# EAGLE board Touch.Cat.0.6 (EAGLE 9.6.2)
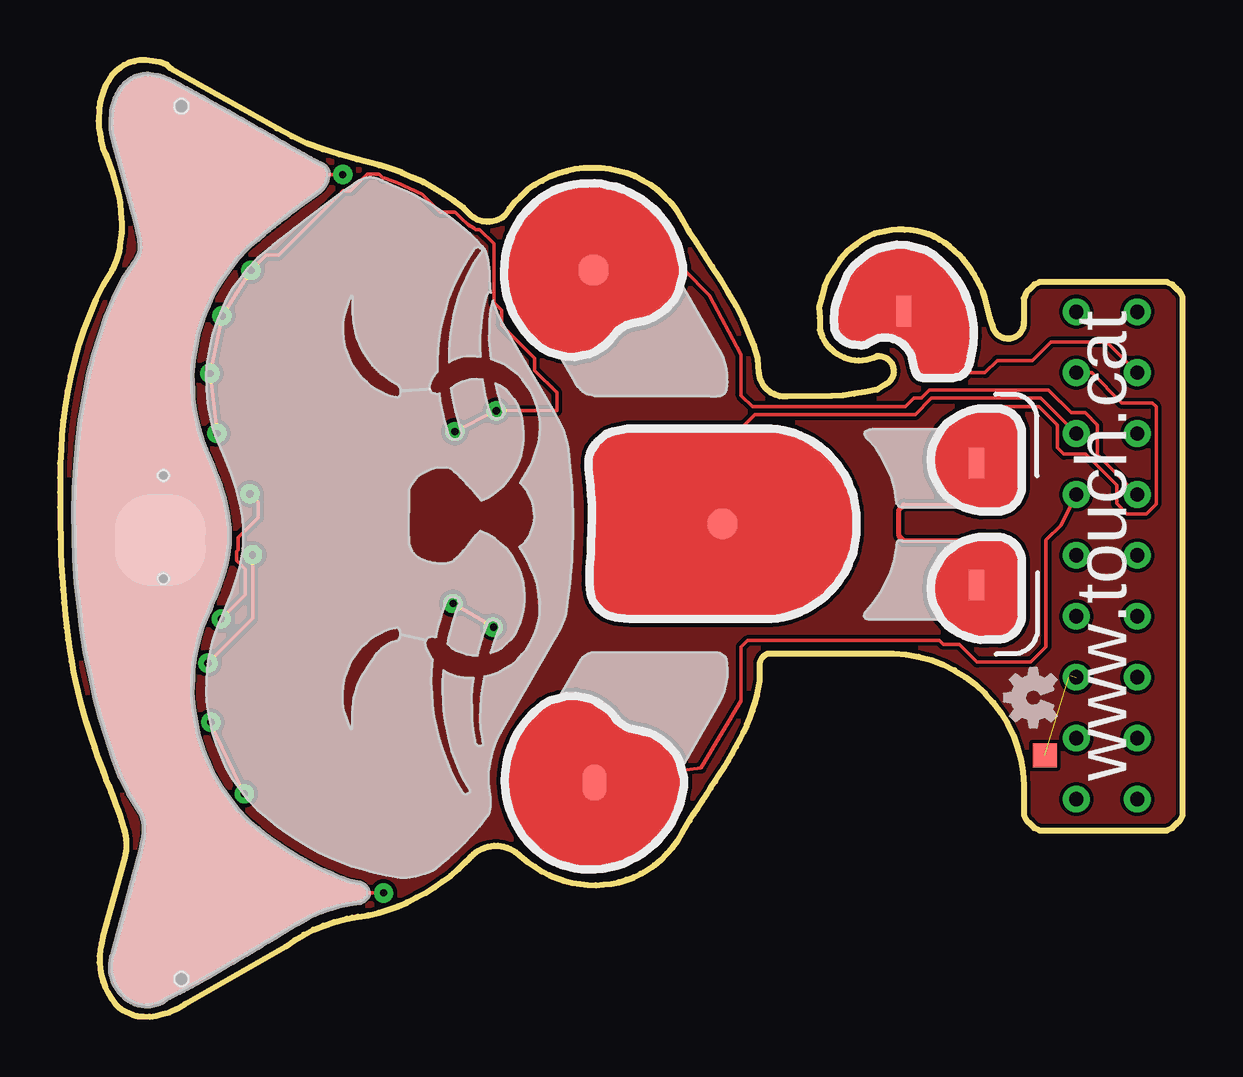
[diagram p0: board, top side]
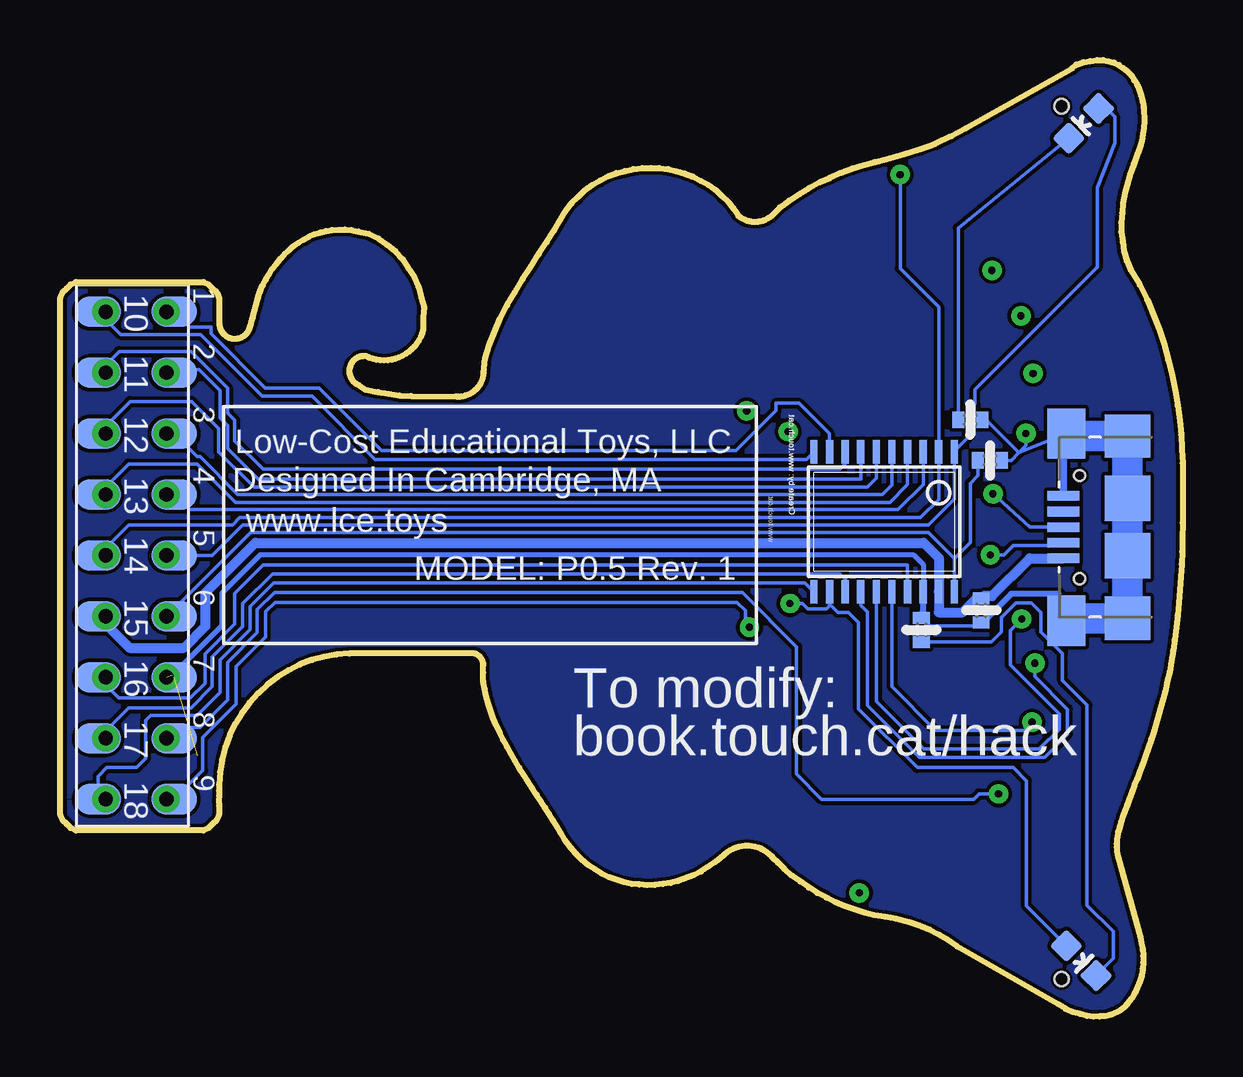
[diagram p1: board, bottom side, seen from below]

Size 46.8 x 39.88 mm. Coordinates in mm from the lower left corner, seen from the top.
Outline: 40.18,9.67 40.18,9.43 40.18,9.21 40.19,8.99 40.18,8.8 40.18,8.42 40.28,8.19 40.45,8.03 40.61,7.86 40.84,7.76 46.14,7.76 46.37,7.86 46.53,8.03 46.7,8.19 46.8,8.42 46.8,29.97 46.7,30.2 46.53,30.36 46.37,30.52 46.14,30.62 40.84,30.62 40.61,30.52 40.45,30.36 40.28,30.2 40.17,29.94 40.17,28.94 arc-176 38.87,28.84 38.77,29.14 38.55,29.99 38.46,30.24 38.35,30.49 38.23,30.72 38.1,30.95 37.96,31.17 37.8,31.38 37.64,31.58 37.46,31.78 37.27,31.94 37.08,32.11 36.88,32.26 36.66,32.39 36.44,32.51 36.21,32.61 35.96,32.69 35.72,32.76 35.47,32.8 35.2,32.81 34.94,32.81 34.66,32.79 34.38,32.73 33.94,32.63 33.54,32.44 33.18,32.18 32.83,31.92 32.53,31.59 32.29,31.21 32.05,30.84 31.87,30.43 31.75,30 31.64,29.57 31.67,29.14 31.67,28.64 arc102 34.07,27.54 arc-162 34.37,26.34 34.07,26.14 33.57,26.04 33.11,25.97 32.66,25.9 32.18,25.88 30.3,25.86 arc-92 29.14,26.84 29.09,27.44 28.93,27.98 28.7,28.54 28.47,29.1 28.17,29.65 27.85,30.2 27.53,30.74 27.18,31.27 26.85,31.78 26.52,32.28 26.21,32.77 25.95,33.22 25.73,33.59 25.48,33.91 25.2,34.18 24.92,34.45 24.62,34.68 24.29,34.85 23.96,35.03 23.62,35.16 23.26,35.25 22.91,35.34 22.55,35.38 22.19,35.38 21.82,35.38 21.46,35.33 21.11,35.24 20.77,35.15 20.42,35.02 20.1,34.85 19.79,34.68 19.49,34.47 19.22,34.21 18.95,33.96 18.73,33.69 18.53,33.39 arc-79 17.15,33.38 16.8,33.73 16.41,34.02 16,34.28 15.58,34.55 15.15,34.78 14.7,34.98 14.25,35.18 13.79,35.35 13.32,35.49 12.85,35.63 12.37,35.74 11.64,35.95 arc-15 9.05,37.03 4.62,39.53 4.45,39.69 4.15,39.79 3.87,39.84 3.59,39.88 3.33,39.87 3.1,39.82 2.88,39.77 2.67,39.67 2.49,39.54 2.31,39.4 2.16,39.24 2.04,39.04 1.91,38.84 1.81,38.62 1.74,38.38 1.67,38.13 1.63,37.87 1.61,37.33 1.62,37.06 1.67,36.78 1.71,36.5 1.79,36.22 1.9,35.95 2.06,35.55 2.2,35.14 2.42,34.33 2.5,33.92 2.54,33.52 2.58,33.11 2.57,32.7 2.52,32.31 2.46,31.9 2.35,31.51 2.17,31.12 1.8,30.51 1.5,29.89 0.98,28.64 0.78,28.01 0.61,27.38 0.44,26.71 0.31,26.08 0.22,25.47 0.13,24.85 0.08,24.26 0.04,23.66 0.01,23.07 0,22.47 0,21.85 0,21.23 0.02,20.59 0.03,19.91 0.04,19.39 0.06,18.86 0.09,18.32 0.12,17.79 0.17,17.25 0.22,16.74 0.28,16.22 0.34,15.72 0.41,15.26 0.48,14.8 0.56,14.37 0.64,14.01 0.74,13.55 0.85,13.12 1.08,12.31 1.2,11.92 1.32,11.56 1.44,11.2 1.56,10.86 1.68,10.54 1.8,10.22 1.91,9.92 2.02,9.63 2.13,9.35 2.23,9.09 2.33,8.84 2.42,8.59 2.5,8.36 2.57,8.14 2.64,7.92 2.7,7.72 2.73,7.52 arc-27 2.69,6.62 1.78,3.34 1.73,3.07 arc52 2.31,0.53 2.45,0.39 2.62,0.26 3.02,0.08 3.24,0.03 3.48,0.01 3.73,0 4,0.03 4.29,0.11 4.58,0.19 4.88,0.33 5.2,0.52 9.42,2.93 arc-21 11.41,3.94 11.96,4.08 12.18,4.12 12.43,4.16 12.86,4.23 13.28,4.34 14.1,4.61 14.49,4.77 14.86,4.97 15.24,5.16 15.6,5.39 15.95,5.63 16.29,5.88 16.62,6.15 16.89,6.43 17.05,6.58 arc-99 19.2,6.68 19.49,6.45 19.8,6.25 20.09,6.05 20.4,5.9 21.03,5.66 21.36,5.58 21.68,5.53 22.01,5.49 22.34,5.48 22.66,5.51 22.98,5.54 23.3,5.6 23.61,5.71 23.92,5.81 24.22,5.95 24.78,6.32 25.05,6.53 25.29,6.79 25.53,7.05 25.75,7.34 25.95,7.68 26.09,7.93 26.25,8.18 26.42,8.45 26.58,8.71 26.76,8.98 26.94,9.25 27.12,9.53 27.31,9.81 27.49,10.09 27.67,10.38 27.85,10.67 28.01,10.96 28.18,11.26 28.34,11.56 28.49,11.86 28.63,12.16 28.76,12.46 28.87,12.77 28.97,13.07 29.05,13.38 29.11,13.68 29.17,13.99 29.17,14.34 29.17,14.64 arc-76 29.52,15.14 34.75,15.14 arc-87 40.18,9.67
Copper layers (1*16): Top 0.035mm / dielectric 1.5mm / Bottom 0.035mm
Design rules "default *": minimum track width 6mil, minimum drill 0.35mm, track to track 6mil, track to pad 6mil, pad to pad 6mil, via to via 6mil, smd to smd 6mil, copper to edge 6mil, drill to drill 6mil, minimum pad ring 10mil, minimum via ring 8mil, stop-mask expansion 4mil, vias tented up to drill 0mil, thermal gap 10mil
Holes 0.6 mm at 5.06,1.57 5.06,37.95

## Footprints (pad centres in the part's own frame; a part is rotated, then mirrored left to right if it is on the bottom)
C0402 = smd 0.5 x 0.7: 1 -0.5,0; 2 0.5,0
TSSOP20 = smd 0.305 x 0.991: 1 -2.925,-2.918; 2 -2.275,-2.918; 3 -1.625,-2.918; 4 -0.975,-2.918; 5 -0.325,-2.918; 6 0.325,-2.918; 7 0.975,-2.918; 8 1.625,-2.918; 9 2.275,-2.918; 10 2.925,-2.918; 11 2.925,2.918; 12 2.275,2.918; 13 1.625,2.918; 14 0.975,2.918; 15 0.325,2.918; 16 -0.325,2.918; 17 -0.975,2.918; 18 -1.625,2.918; 19 -2.275,2.918; 20 -2.925,2.918
GHI-CONNECTORS_10118192-0001LF(MICRO-USB-B-AMPHENOL-FCI) = smd 1.8 x 1.9: CGND1 -3.8,0; CGND4 3.8,0 | smd 1.9 x 1.9: CGND2 -1.2,0; CGND3 1.2,0 | smd 2.1 x 1.6: CGND5 3.9,2.55; CGND6 -3.9,2.55 | smd 0.4 x 1.35: D+ 0,2.675; D- -0.65,2.675; GND 1.3,2.675; ID 0.65,2.675; VCC -1.3,2.675 | hole 0.45: -2.15,2; 2.15,2
PADVIA = drill 0.3: P$1 0,0
COM = drill 0.6: 1 8.89,1.27; 2 6.35,1.27; 3 3.81,1.27; 4 1.27,1.27; 5 -1.27,1.27; 6 -3.81,1.27; 7 -6.35,1.27; 8 -8.89,1.27; 9 -11.43,1.27; 10 8.89,-1.27; 11 6.35,-1.27; 12 3.81,-1.27; 13 1.27,-1.27; 14 -1.27,-1.27; 15 -3.81,-1.27; 16 -6.35,-1.27; 17 -8.89,-1.27; 18 -11.43,-1.27 | smd 1.27 x 1.905 bottom: 1.1 8.89,1.587; 2.1 6.35,1.587; 3.1 3.81,1.587; 4.1 1.27,1.587; 5.1 -1.27,1.587; 6.1 -3.81,1.587; 7.1 -6.35,1.587; 8.1 -8.89,1.587; 9.1 -11.43,1.587; 10.1 8.89,-1.587; 11.1 6.35,-1.587; 12.1 3.81,-1.587; 13.1 1.27,-1.587; 14.1 -1.27,-1.587; 15.1 -3.81,-1.587; 16.1 -6.35,-1.587; 17.1 -8.89,-1.587; 18.1 -11.43,-1.587
HEAD-TOUCH-CAT = smd 3.81 x 3.81: P$1 0,0
BELLY-TOUCH-CAT = smd 1.27 x 1.27: P$1 0,0
RIGHT_HAND-TOUCH-CAT = smd 1.5 x 1: P$1 0,0
LEFT_HAND-TOUCH-CAT = smd 1.27 x 1.27: P$1 0,0
FEET-TOUCH-CAT = smd 1.27 x 0.635: P$1 -2.54,0; P$2 2.54,0
TAIL-TOUCH-CAT = smd 1.27 x 0.635: P$1 0,0
0603-ORANGE = smd 1 x 1: A 0,-0.877; C 0,0.877
R0402 = smd 0.5 x 0.7: 1 -0.5,0; 2 0.5,0
OSHW-LOGO-MINI = smd 1 x 1: P$1 -2.4,-0.5

## Placement (x,y rotation side)
C1  [C0402]  8.04,23.19 180 bottom
C2  [C0402]  8.41,16.94 90 bottom
U$1  CHIP-TOUCH-CAT  [TSSOP20]  12.45,20.63 180 bottom
U$2  USB  [GHI-CONNECTORS_10118192-0001LF(MICRO-USB-B-AMPHENOL-FCI)]  2.31,20.41 90 bottom
U$3  PADVIA  [PADVIA]  18.07,16.24 90 top
U$4  COM-TOUCH-CAT  [COM]  43.64,20.5 90 top
U$5  PADVIA  [PADVIA]  16.38,17.22 90 top
U$6  PADVIA  [PADVIA]  18.19,25.26 90 top
U$7  PADVIA  [PADVIA]  16.45,24.39 90 top
U$8  PADVIA  [PADVIA]  13.49,5.16 90 top
U$9  PADVIA  [PADVIA]  11.78,35.1 90 top
U$11  PADVIA  [PADVIA]  7.69,9.29 90 top
U$12  PADVIA  [PADVIA]  6.29,12.27 90 top
U$13  PADVIA  [PADVIA]  7.92,21.8 90 top
U$14  PADVIA  [PADVIA]  6.72,16.58 90 top
U$15  PADVIA  [PADVIA]  6.17,14.74 90 top
U$16  PADVIA  [PADVIA]  8.03,19.25 90 top
U$17  HEAD-TOUCH-CAT  [HEAD-TOUCH-CAT]  4.17,19.87 90 top
U$18  BELLY-TOUCH-CAT  [BELLY-TOUCH-CAT]  27.61,20.55 90 top
U$19  RIGHT_HAND-TOUCH-CAT  [RIGHT_HAND-TOUCH-CAT]  22.28,9.76 90 top
U$20  LEFT_HAND-TOUCH-CAT  [LEFT_HAND-TOUCH-CAT]  22.24,31.12 90 top
U$21  FEET-TOUCH-CAT  [FEET-TOUCH-CAT]  38.2,20.53 90 top
U$22  TAIL-TOUCH-CAT  [TAIL-TOUCH-CAT]  35.18,29.4 90 top
U$23  PADVIA  [PADVIA]  6.55,24.31 90 top
U$24  PADVIA  [PADVIA]  6.25,26.81 90 top
U$25  PADVIA  [PADVIA]  6.75,29.21 90 top
U$26  PADVIA  [PADVIA]  7.96,31.11 90 top
U$27  [0603-ORANGE]  4.24,2.33 225 bottom
U$28  [R0402]  8.87,24.88 180 bottom
U$29  [0603-ORANGE]  4.14,37.24 135 bottom
U$30  [R0402]  10.9,16.13 270 bottom
U$31  OSHW-LOGO  [OSHW-LOGO-MINI]  40.56,13.3 90 top
U$33  ABOUT-TOUCH-CAT  [ABOUT-TOUCH-CAT]  44.57,19.74 90 top

## Library data of the parts
C1 C2 = Touch
U$1 U$3-U$9 U$11-U$30 U$33 = Touch-cat
U$2 U$31 = chip-brain

## Nets
1: U$1.9 U$4.1 U$4.1.1
BELLY: U$1.5 U$4.3 U$4.3.1 U$18.P$1
FEET: U$1.7 U$4.2 U$4.2.1 U$21.P$1 U$21.P$2
GND: C1.1 C2.1 U$1.18 U$2.CGND1 U$2.CGND2 U$2.CGND3 U$2.CGND4 U$2.CGND5 U$2.CGND6 U$2.GND U$4.7 U$4.7.1 U$6.P$1 U$7.P$1 U$23.P$1 U$24.P$1 U$25.P$1 U$26.P$1 U$28.1 U$30.1 U$31.P$1
HEAD: U$1.2 U$4.14 U$4.14.1 U$8.P$1 U$9.P$1 U$17.P$1
ID: U$2.ID
LEFT_HAND: U$1.4 U$4.13 U$4.13.1 U$20.P$1
N$2: U$27.C U$30.2
N$19: U$28.2 U$29.C
PIN1: U$1.1 U$4.5 U$4.5.1 U$29.A
PIN6: U$1.6 U$4.12 U$4.12.1
PIN10: U$1.10 U$4.10 U$4.10.1
PIN11: U$1.11 U$4.18 U$4.18.1
PIN12: U$1.12 U$3.P$1 U$4.9 U$4.9.1 U$5.P$1 U$27.A
PIN13: U$1.13 U$4.17 U$4.17.1
PIN16: U$1.16 U$4.8 U$4.8.1 U$11.P$1 U$12.P$1
PIN17: U$1.17 U$4.16 U$4.16.1
PIN20: C1.2 U$1.20 U$4.6 U$4.6.1
RIGHT_HAND: U$1.3 U$4.4 U$4.4.1 U$19.P$1
TAIL: U$1.8 U$4.11 U$4.11.1 U$22.P$1
UDM: U$1.15 U$2.D+ U$13.P$1 U$14.P$1
UDP: U$1.14 U$2.D- U$15.P$1 U$16.P$1
VCC: C2.2 U$1.19 U$2.VCC U$4.15 U$4.15.1

## Tracks (layer width: path | path; a pad name or v marks a point on that pad's centre or on a via)
1
  Bottom 0.152: U$1.9 14.74,23.56 14.74,24.31 16.01,25.58 16.96,25.58 16.96,25.26 18.62,23.6 33.4,23.6 36.02,26.21 38.25,26.21 40.51,28.48 40.51,28.75 40.52,28.75 41.41,28.75 U$4.1.1 U$4.1
BELLY
  Top 0.152: U$18.P$1 27.64,20.58 27.64,23.77 28.97,25.09 35.65,25.09 36.33,25.78 40.89,25.78 U$4.3
  Bottom 0.152: U$1.5 12.13,22.16 12.52,21.77 39.39,21.77 40.97,23.34 41.08,23.34 U$4.3.1 U$4.3
FEET
  Top 0.152: U$4.2 43,26.85 44.27,25.58 45.54,25.58 45.69,25.43 45.69,21.37 45.28,20.96 44.47,20.96 44.05,21.38 44.05,22.15 42.75,23.45 41.85,23.45 41.58,23.72 41.58,24.66 40.81,25.44 39.21,25.44 38.21,24.44 U$21.P$2 | 38.54,23.41 U$21.P$2 | U$21.P$2
  Top 0.203: U$21.P$1 38.2,19.11 37.47,19.84 35.17,19.84 34.97,20.04 34.97,21.14 35.17,21.34 38.27,21.34 38.37,21.44 38.37,22.9 U$21.P$2
  Bottom 0.152: U$1.7 13.43,22.4 38.55,22.4 39.83,23.67 39.83,24.64 40.14,24.95 40.14,26.1 41.02,26.97 42.24,26.97 U$4.2 U$4.2.1
GND  (2 unrouted)
  Top 0.152: U$23.P$1 U$24.P$1 U$25.P$1 U$26.P$1 8.59,31.75 9.11,31.75 11.8,34.44 12.11,34.44 12.8,35.13 13.3,35.13 13.47,34.95 13.53,34.95 14.06,34.76 15.1,34.29 15.85,33.54 16.46,33.54 16.5,33.51 16.81,33.19 16.91,33.11 17,33.02 17.27,32.87 17.32,32.82 17.49,32.82 18.09,32.22 18.09,29.77 18.41,29.45 18.41,28.82 19.78,27.45 19.78,26.94 20.71,26.01 20.71,25.26 U$6.P$1 U$7.P$1
  Bottom 0.152: 8.41,16.45 C2.1 8.55,16.3 10.57,16.3 U$30.1 10.9,16.92 10.83,16.99 | 5.18,17.63 U$2.CGND6 | U$2.CGND5 6.84,23.51 | U$28.1 8.21,24.88 6.84,23.51 | C1.1 7.16,23.19 6.84,23.51 | 6.84,23.51 6.55,23.8 U$23.P$1 | 3.82,16.27 4.16,16.61
  Bottom 0.203: U$1.18 10.83,18.84 11.24,19.26 38.45,19.26 40.05,17.66 40.05,16.3 42.13,14.23
  Bottom 0.254: U$4.7.1 42.13,14.23 | 5.18,17.63 7.16,17.63 8.35,16.44 C2.1 | 10.83,16.74 10.83,16.99 U$1.18
  Bottom 0.305: U$2.GND 4.98,23.38 U$2.CGND5
  Bottom 1.27: U$2.CGND6 4.16,16.61 U$2.CGND1 U$2.CGND2 U$2.CGND3 U$2.CGND4 4.16,24.21 U$2.CGND5
HEAD
  Top 0.152: U$9.P$1 5.53,35.1 4.17,33.74 U$17.P$1 4.17,8.53 7.54,5.16 U$8.P$1
  Bottom 0.152: U$9.P$1 11.78,31.19 10.18,29.59 U$1.2 10.18,21.57 10.95,20.8 39.32,20.8 39.62,20.5 43.95,20.5 U$4.14.1 U$4.14
LEFT_HAND
  Top 0.152: U$4.13 43.24,23.43 43.24,24.67 42.73,25.18 42.15,25.18 41.21,26.12 36.24,26.12 35.91,25.79 35.59,25.79 35.23,25.43 28.86,25.43 28.39,25.9 28.39,27.61 27.08,30.07 26.03,31.12 U$20.P$1
  Bottom 0.152: U$1.4 11.48,22.17 12.21,21.44 39.5,21.44 41.09,23.04 43.95,23.04 U$4.13.1 U$4.13
N$1
  pour Top: 3.48,0.01 3.73,0 4,0.03 4.29,0.11 4.58,0.19 4.88,0.33 5.2,0.52 9.42,2.93 arc-21 11.41,3.94 11.96,4.08 12.18,4.12 12.43,4.16 12.86,4.23 13.28,4.34 14.1,4.61 14.49,4.77 14.86,4.97 15.24,5.16 15.6,5.39 15.95,5.63 16.29,5.88 16.62,6.15 16.89,6.43 17.05,6.58 arc-99 19.2,6.68 19.49,6.45 19.8,6.25 20.09,6.05 20.4,5.9 21.03,5.66 21.36,5.58 21.68,5.53 22.01,5.49 22.34,5.48 22.66,5.51 22.98,5.54 23.3,5.6 23.61,5.71 23.92,5.81 24.22,5.95 24.78,6.32 25.05,6.53 25.29,6.79 25.53,7.05 25.75,7.34 25.95,7.68 26.09,7.93 26.25,8.18 26.42,8.45 26.58,8.71 26.76,8.98 26.94,9.25 27.12,9.53 27.31,9.81 27.49,10.09 27.67,10.38 27.85,10.67 28.01,10.96 28.18,11.26 28.34,11.56 28.49,11.86 28.63,12.16 28.76,12.46 28.87,12.77 28.97,13.07 29.05,13.38 29.11,13.68 29.17,13.99 29.17,14.34 29.17,14.64 arc-76 29.52,15.14 34.75,15.14 arc-87 40.18,9.67 40.18,9.43 40.18,9.21 40.19,8.99 40.18,8.8 40.18,8.42 40.28,8.19 40.45,8.03 40.61,7.86 40.84,7.76 46.14,7.76 46.37,7.86 46.53,8.03 46.7,8.19 46.8,8.42 46.8,29.97 46.7,30.2 46.53,30.36 46.37,30.52 46.14,30.62 40.84,30.62 40.61,30.52 40.45,30.36 40.28,30.2 40.17,29.94 40.17,28.94 arc-176 38.87,28.84 38.77,29.14 38.55,29.99 38.46,30.24 38.35,30.49 38.23,30.72 38.1,30.95 37.96,31.17 37.8,31.38 37.64,31.58 37.46,31.78 37.27,31.94 37.08,32.11 36.88,32.26 36.66,32.39 36.44,32.51 36.21,32.61 35.96,32.69 35.72,32.76 35.47,32.8 35.2,32.81 34.94,32.81 34.66,32.79 34.38,32.73 33.94,32.63 33.54,32.44 33.18,32.18 32.83,31.92 32.53,31.59 32.29,31.21 32.05,30.84 31.87,30.43 31.75,30 31.64,29.57 31.67,29.14 31.67,28.64 arc102 34.07,27.54 arc-162 34.37,26.34 34.07,26.14 33.57,26.04 33.11,25.97 32.66,25.9 32.18,25.88 30.3,25.86 arc-92 29.14,26.84 29.09,27.44 28.93,27.98 28.7,28.54 28.47,29.1 28.17,29.65 27.85,30.2 27.53,30.74 27.18,31.27 26.85,31.78 26.52,32.28 26.21,32.77 25.95,33.22 25.73,33.59 25.48,33.91 25.2,34.18 24.92,34.45 24.62,34.68 24.29,34.85 23.96,35.03 23.62,35.16 23.26,35.25 22.91,35.34 22.55,35.38 22.19,35.38 21.82,35.38 21.46,35.33 21.11,35.24 20.77,35.15 20.42,35.02 20.1,34.85 19.79,34.68 19.49,34.47 19.22,34.21 18.95,33.96 18.73,33.69 18.53,33.39 arc-79 17.15,33.38 16.8,33.73 16.41,34.02 16,34.28 15.58,34.55 15.15,34.78 14.7,34.98 14.25,35.18 13.79,35.35 13.32,35.49 12.85,35.63 12.37,35.74 11.64,35.95 arc-15 9.05,37.03 4.62,39.53 4.45,39.69 4.15,39.79 3.87,39.84 3.59,39.88 3.33,39.87 3.1,39.82 2.88,39.77 2.67,39.67 2.49,39.54 2.31,39.4 2.16,39.24 2.04,39.04 1.91,38.84 1.81,38.62 1.74,38.38 1.67,38.13 1.63,37.87 1.61,37.33 1.62,37.06 1.67,36.78 1.71,36.5 1.79,36.22 1.9,35.95 2.06,35.55 2.2,35.14 2.42,34.33 2.5,33.92 2.54,33.52 2.58,33.11 2.57,32.7 2.52,32.31 2.46,31.9 2.35,31.51 2.17,31.12 1.8,30.51 1.5,29.89 0.98,28.64 0.78,28.01 0.61,27.38 0.44,26.71 0.31,26.08 0.22,25.47 0.13,24.85 0.08,24.26 0.04,23.66 0.01,23.07 0,22.47 0,21.85 0,21.23 0.02,20.59 0.03,19.91 0.04,19.39 0.06,18.86 0.09,18.32 0.12,17.79 0.17,17.25 0.22,16.74 0.28,16.22 0.34,15.72 0.41,15.26 0.48,14.8 0.56,14.37 0.64,14.01 0.74,13.55 0.85,13.12 1.08,12.31 1.2,11.92 1.32,11.56 1.44,11.2 1.56,10.86 1.68,10.54 1.8,10.22 1.91,9.92 2.02,9.63 2.13,9.35 2.23,9.09 2.33,8.84 2.42,8.59 2.5,8.36 2.57,8.14 2.64,7.92 2.7,7.72 2.73,7.52 arc-27 2.69,6.62 1.78,3.34 1.73,3.07 arc52 2.31,0.53 2.45,0.39 2.62,0.26 3.02,0.08 3.24,0.03
N$2
  Bottom 0.152: U$30.2 7.98,15.63 7.57,16.04 7.57,16.64 6.96,17.25 6.32,17.25 5.92,16.85 5.92,16.03 5.03,15.14 5.03,14.02 4,12.99 4,4.64 2.9,3.55 2.9,2.42 U$27.C
N$3
  pour Bottom: 3.48,0.01 3.73,0 4,0.03 4.29,0.11 4.58,0.19 4.88,0.33 5.2,0.52 9.42,2.93 arc-21 11.41,3.94 11.96,4.08 12.18,4.12 12.43,4.16 12.86,4.23 13.28,4.34 14.1,4.61 14.49,4.77 14.86,4.97 15.24,5.16 15.6,5.39 15.95,5.63 16.29,5.88 16.62,6.15 16.89,6.43 17.05,6.58 arc-99 19.2,6.68 19.49,6.45 19.8,6.25 20.09,6.05 20.4,5.9 21.03,5.66 21.36,5.58 21.68,5.53 22.01,5.49 22.34,5.48 22.66,5.51 22.98,5.54 23.3,5.6 23.61,5.71 23.92,5.81 24.22,5.95 24.78,6.32 25.05,6.53 25.29,6.79 25.53,7.05 25.75,7.34 25.95,7.68 26.09,7.93 26.25,8.18 26.42,8.45 26.58,8.71 26.76,8.98 26.94,9.25 27.12,9.53 27.31,9.81 27.49,10.09 27.67,10.38 27.85,10.67 28.01,10.96 28.18,11.26 28.34,11.56 28.49,11.86 28.63,12.16 28.76,12.46 28.87,12.77 28.97,13.07 29.05,13.38 29.11,13.68 29.17,13.99 29.17,14.34 29.17,14.64 arc-76 29.52,15.14 34.75,15.14 arc-87 40.18,9.67 40.18,9.43 40.18,9.21 40.19,8.99 40.18,8.8 40.18,8.42 40.28,8.19 40.45,8.03 40.61,7.86 40.84,7.76 46.14,7.76 46.37,7.86 46.53,8.03 46.7,8.19 46.8,8.42 46.8,29.97 46.7,30.2 46.53,30.36 46.37,30.52 46.14,30.62 40.84,30.62 40.61,30.52 40.45,30.36 40.28,30.2 40.17,29.94 40.17,28.94 arc-176 38.87,28.84 38.77,29.14 38.55,29.99 38.46,30.24 38.35,30.49 38.23,30.72 38.1,30.95 37.96,31.17 37.8,31.38 37.64,31.58 37.46,31.78 37.27,31.94 37.08,32.11 36.88,32.26 36.66,32.39 36.44,32.51 36.21,32.61 35.96,32.69 35.72,32.76 35.47,32.8 35.2,32.81 34.94,32.81 34.66,32.79 34.38,32.73 33.94,32.63 33.54,32.44 33.18,32.18 32.83,31.92 32.53,31.59 32.29,31.21 32.05,30.84 31.87,30.43 31.75,30 31.64,29.57 31.67,29.14 31.67,28.64 arc102 34.07,27.54 arc-162 34.37,26.34 34.07,26.14 33.57,26.04 33.11,25.97 32.66,25.9 32.18,25.88 30.3,25.86 arc-92 29.14,26.84 29.09,27.44 28.93,27.98 28.7,28.54 28.47,29.1 28.17,29.65 27.85,30.2 27.53,30.74 27.18,31.27 26.85,31.78 26.52,32.28 26.21,32.77 25.95,33.22 25.73,33.59 25.48,33.91 25.2,34.18 24.92,34.45 24.62,34.68 24.29,34.85 23.96,35.03 23.62,35.16 23.26,35.25 22.91,35.34 22.55,35.38 22.19,35.38 21.82,35.38 21.46,35.33 21.11,35.24 20.77,35.15 20.42,35.02 20.1,34.85 19.79,34.68 19.49,34.47 19.22,34.21 18.95,33.96 18.73,33.69 18.53,33.39 arc-79 17.15,33.38 16.8,33.73 16.41,34.02 16,34.28 15.58,34.55 15.15,34.78 14.7,34.98 14.25,35.18 13.79,35.35 13.32,35.49 12.85,35.63 12.37,35.74 11.64,35.95 arc-15 9.05,37.03 4.62,39.53 4.45,39.69 4.15,39.79 3.87,39.84 3.59,39.88 3.33,39.87 3.1,39.82 2.88,39.77 2.67,39.67 2.49,39.54 2.31,39.4 2.16,39.24 2.04,39.04 1.91,38.84 1.81,38.62 1.74,38.38 1.67,38.13 1.63,37.87 1.61,37.33 1.62,37.06 1.67,36.78 1.71,36.5 1.79,36.22 1.9,35.95 2.06,35.55 2.2,35.14 2.42,34.33 2.5,33.92 2.54,33.52 2.58,33.11 2.57,32.7 2.52,32.31 2.46,31.9 2.35,31.51 2.17,31.12 1.8,30.51 1.5,29.89 0.98,28.64 0.78,28.01 0.61,27.38 0.44,26.71 0.31,26.08 0.22,25.47 0.13,24.85 0.08,24.26 0.04,23.66 0.01,23.07 0,22.47 0,21.85 0,21.23 0.02,20.59 0.03,19.91 0.04,19.39 0.06,18.86 0.09,18.32 0.12,17.79 0.17,17.25 0.22,16.74 0.28,16.22 0.34,15.72 0.41,15.26 0.48,14.8 0.56,14.37 0.64,14.01 0.74,13.55 0.85,13.12 1.08,12.31 1.2,11.92 1.32,11.56 1.44,11.2 1.56,10.86 1.68,10.54 1.8,10.22 1.91,9.92 2.02,9.63 2.13,9.35 2.23,9.09 2.33,8.84 2.42,8.59 2.5,8.36 2.57,8.14 2.64,7.92 2.7,7.72 2.73,7.52 arc-27 2.69,6.62 1.78,3.34 1.73,3.07 arc52 2.31,0.53 2.45,0.39 2.62,0.26 3.02,0.08 3.24,0.03
N$19
  Bottom 0.152: U$29.C 9.37,32.88 U$28.2
PIN1
  Bottom 0.152: U$1.1 9.53,21.58 10.62,20.5 39.19,20.5 40.46,19.23 U$4.5.1 U$4.5 | 9.47,23.61 U$1.1 | U$1.1 9.53,23.58 8.87,24.24 8.87,25.34 8.67,25.54 8.67,26.14 3.56,31.25 3.56,34.55 2.85,36.42 2.85,37.52 3.19,37.86 U$29.A
PIN6
  Bottom 0.152: U$1.6 12.78,22.45 13.16,22.07 38.72,22.07 40.19,23.54 40.19,24.52 41.32,25.65 43.88,25.65 U$4.12.1 U$4.12
PIN10
  Bottom 0.152: U$1.10 15.7,23.23 33.66,23.23 36.3,25.87 38.38,25.87 40.95,28.44 44.28,28.44 U$4.10.1 U$4.10
PIN11
  Bottom 0.152: U$1.11 15.76,18.09 37.89,18.09 38.89,17.1 38.89,16.14 40.14,14.88 40.14,13.51 41.09,12.56 43.04,12.56 43.24,12.36 43.24,10.77 43.62,10.39 44.86,10.39 45.22,10.02 U$4.18.1 U$4.18
PIN12
  Top 0.152: U$3.P$1 U$5.P$1
  Bottom 0.152: U$5.P$1 15.86,17.22 15.63,16.99 14.86,16.99 14.74,17.11 14.74,17.2 | 14.74,17.2 U$1.12 | U$27.A 6.52,4.61 6.52,9.84 7.07,10.39 11.07,10.39 13.52,12.84 13.52,16.44 13.94,16.86 14.39,16.86 14.74,17.2 | U$3.P$1 18.2,16.37 18.23,16.37 18.23,16.92 18.59,17.28 37.84,17.28 38.24,16.88 38.24,15.82 39.47,14.59 39.47,13.04 40.86,11.65 40.86,10.26 U$4.9.1 U$4.9
PIN13
  Bottom 0.152: U$1.13 14.08,18.25 14.29,18.46 37.95,18.46 39.19,17.22 39.19,16.26 40.46,14.99 40.46,13.77 41.35,12.88 43.95,12.88 U$4.17.1 U$4.17
PIN16
  Top 0.152: U$11.P$1 6.29,12.21 U$12.P$1
  Bottom 0.152: U$11.P$1 8.49,9.29 8.71,9.07 15.06,9.07 16.11,10.11 16.11,15.42 18.37,17.68 37.87,17.68 38.58,16.97 38.58,16.01 39.83,14.76 39.83,13.2 40.97,12.06 41.6,12.06 U$4.8.1 U$4.8 | U$12.P$1 6.62,11.94 10.31,11.94 12.13,13.76 U$1.16
PIN17
  Bottom 0.152: U$1.17 11.48,18.82 11.48,18.83 38.33,18.83 39.52,17.64 39.52,16.36 40.77,15.12 40.77,13.89 41.37,13.28 44.36,13.28 U$4.16.1 U$4.16
PIN20
  Bottom 0.152: C1.2 8.54,22.56 8.87,22.23 8.87,19.76 9.53,19.1 U$1.20 9.53,19.11 10.62,20.19 38.86,20.19 42.05,17.01 U$4.6.1 U$4.6
RIGHT_HAND
  Top 0.152: U$4.4 41.73,20.5 41.09,19.86 41.09,15.42 40.46,14.78 38.22,14.78 37.48,15.52 36.81,15.52 36.65,15.68 28.66,15.68 28.39,15.42 28.39,13.16 26.72,10.37 U$19.P$1
  Bottom 0.152: U$1.3 10.83,22.19 11.88,21.13 41.41,21.13 U$4.4.1 U$4.4
TAIL
  Top 0.152: U$4.11 43.64,28.12 41.29,28.12 40.53,27.36 39.07,27.36 38.55,26.85 37.73,26.85 U$22.P$1
  Bottom 0.152: U$1.8 14.07,23.05 14.3,22.82 38.34,22.82 39.52,24 39.52,24.86 39.83,25.17 39.83,26.21 41.34,27.73 44.34,27.73 U$4.11.1 U$4.11
UDM
  Top 0.152: U$13.P$1 8.27,21.45 8.27,20.8 8.02,20.55 8.01,20.55 7.43,19.97 7.43,19.45 7.37,19.39 7.37,19.02 7.73,18.66 7.73,17.58 U$14.P$1
  Bottom 0.152: U$1.15 12.78,13.14 10.8,11.16 5.98,11.16 5.16,11.98 5.16,12.63 7.2,14.67 7.2,16.1 U$14.P$1 | U$13.P$1 6.37,20.41 U$2.D+
UDP
  Top 0.152: U$16.P$1 8.03,16.6 U$15.P$1
  Bottom 0.152: 5.09,19.86 U$2.D- 5.1,19.64 7.07,19.64 7.46,19.25 U$16.P$1 | U$1.14 13.43,17.14 13.15,16.86 13.15,12.98 10.99,10.81 5.77,10.81 4.81,11.77 4.81,12.82 6.17,14.18 U$15.P$1
VCC
  Bottom 0.152: U$4.15.1 U$4.15
  Bottom 0.254: 8.31,17.54 C2.2
  Bottom 0.406: U$4.15.1 43.91,15.38 41.64,15.38 40.74,16.28 40.74,17.68 38.66,19.75 10.81,19.75 10.18,19.13 U$1.19 10.18,16.86 9.19,16.86 8.61,17.44 C2.2 | U$2.VCC 6.39,19.11 7.96,17.54 8.31,17.54

## Text on the board
bPlace: Low-Cost Educational Toys, LLC | Designed In Cambridge, MA | www.touch.cat | www.lce.toys | MODEL: P0.5 Rev. 1 | To modify: | book.touch.cat/hack
Reference: By: www.touch.cat | Originally assembled in Space Coast, Florida, USA | Released under the Creative Commons. | Attribution Share-Alike 4.0 License | https://creativecommons.org/licenses/by-nc/4.0/